# Altium PCB PCB_BoostingConverter.PcbDoc
Units mil, origin at the board's own origin, x right, y up, seen from the top; angles counter-clockwise.
Board outline 1889.76 x 944.88 mil, 2 copper layers (Top Layer, Bottom Layer); 13 components, 10 nets, 40 pads, 5 vias.
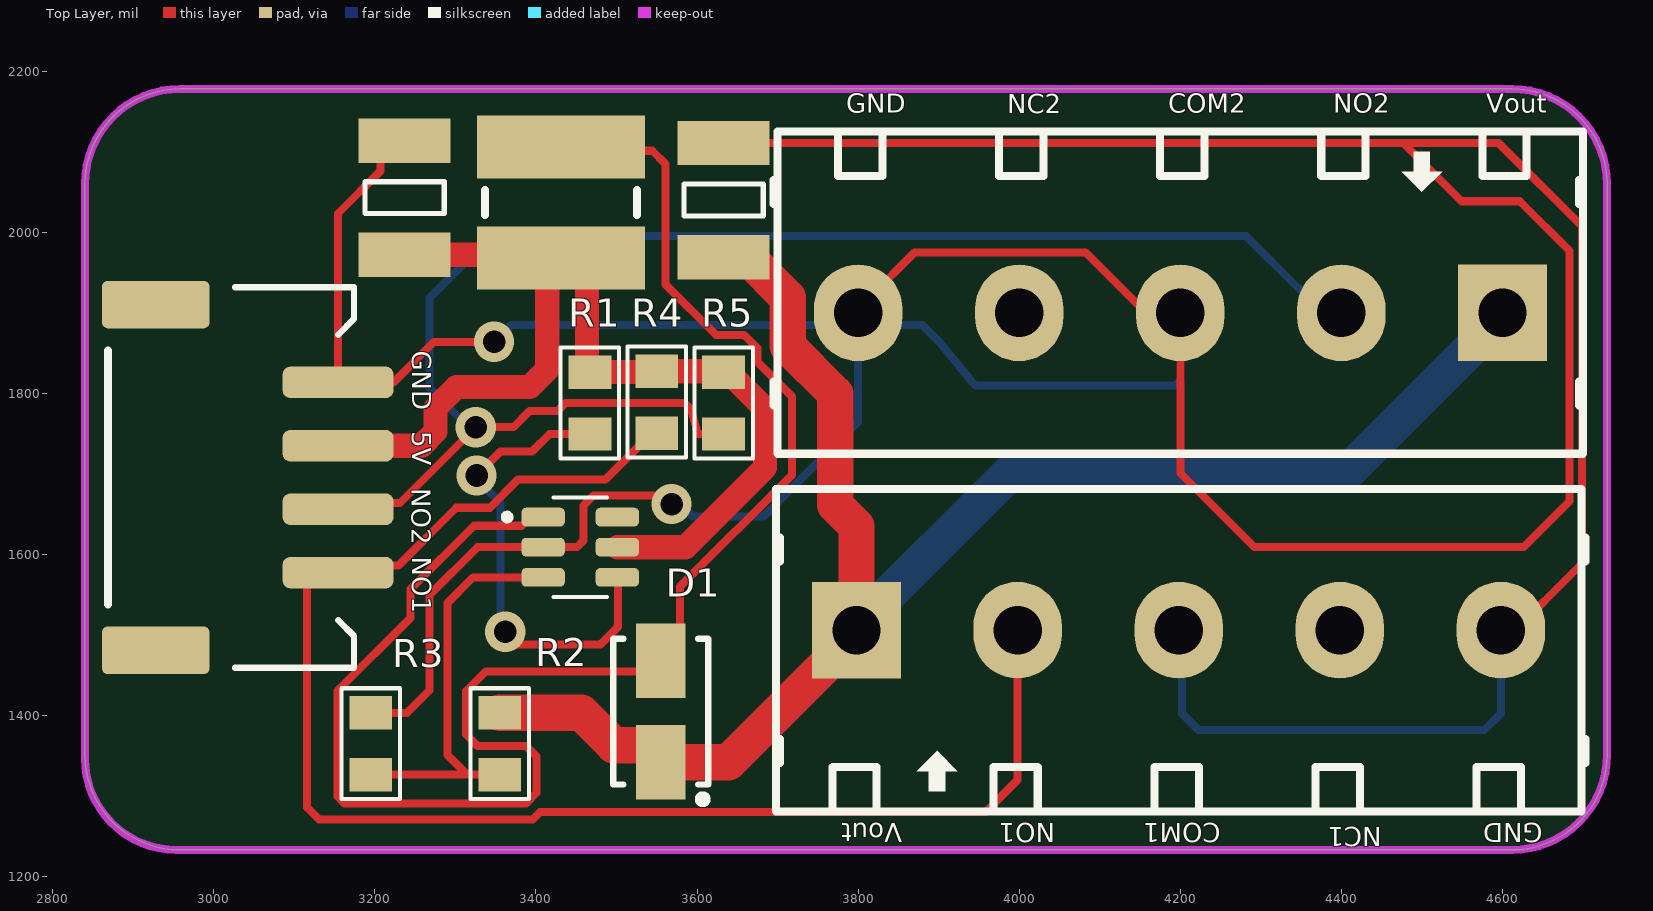
[diagram p0: Top Layer view]
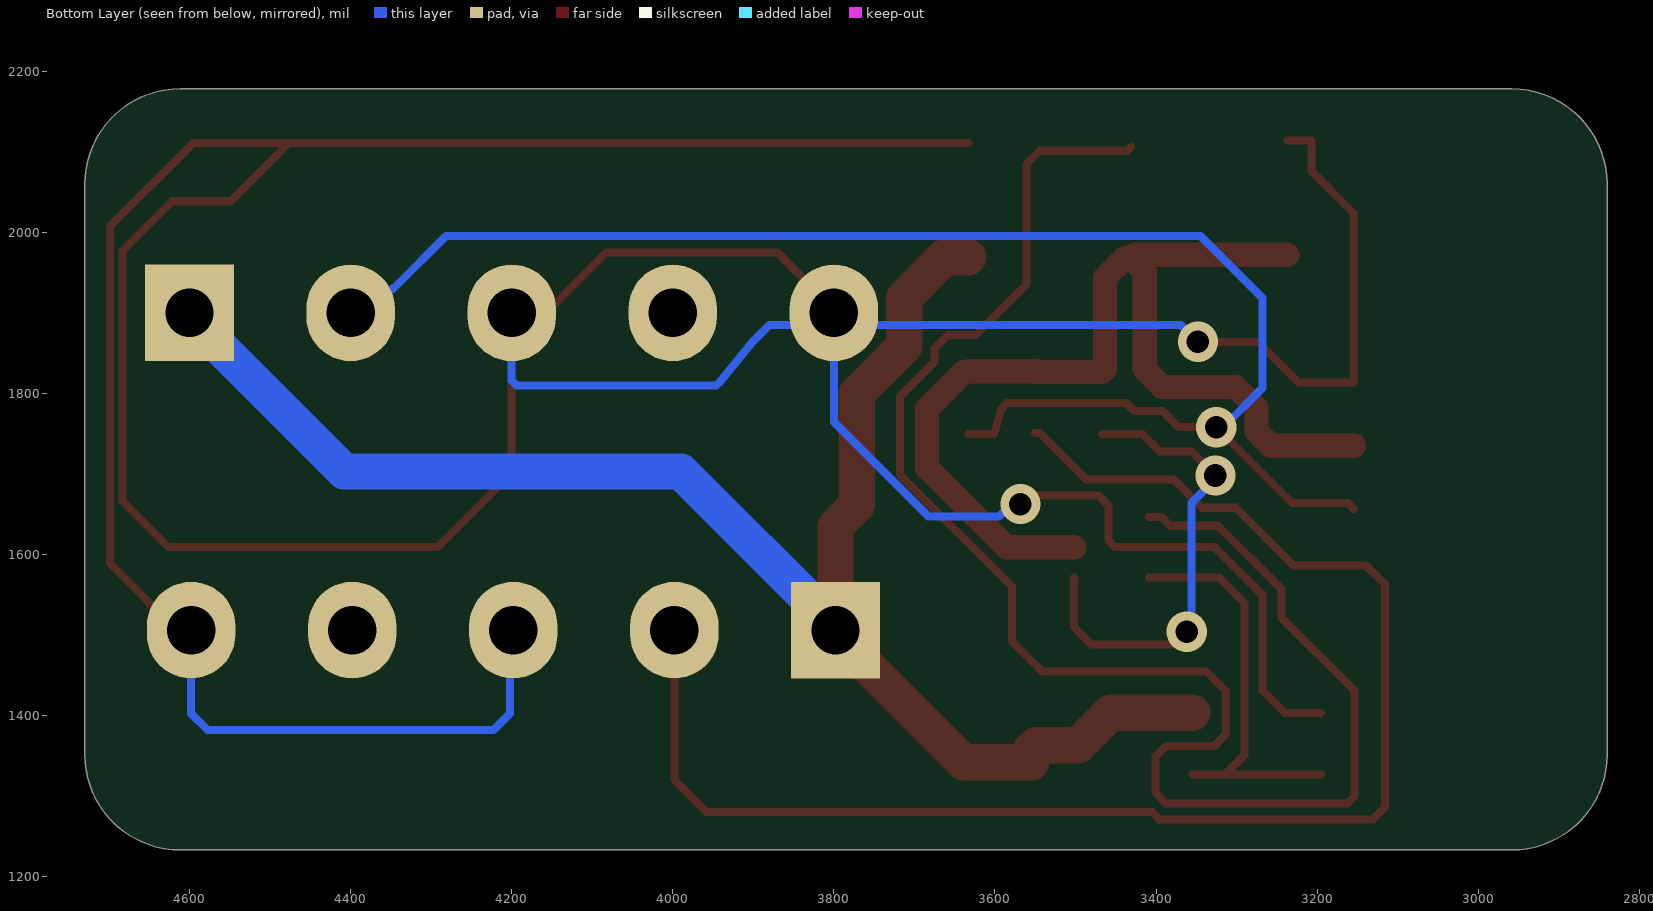
[diagram p1: Bottom Layer view, seen from below]

## Layer stack, top to bottom
Top Solder: solder mask 0.4, Solder Resist, Dk 3.5
Top Layer: signal copper 1.4
Dielectric 1: dielectric 12.6, FR-4, Dk 4.8
Bottom Layer: signal copper 1.4
Bottom Solder: solder mask 0.4, Solder Resist, Dk 3.5

## Board outline
2840.08,1351.26 2840.08,2059.92 cw(c2958.19,2059.92) 2958.19,2178.03 4611.73,2178.03 cw(c4611.73,2059.92) 4729.84,2059.92 4729.84,1351.26 cw(c4611.73,1351.26) 4611.73,1233.15 2958.19,1233.15 cw(c2958.19,1351.26)

## Design rules (kind name [scope] priority, off if disabled: settings)
Clearance [All] p1: gap=10 ignorepadtopadclearanceinfootprint=FALSE except(0: Arc-Hole Track-Hole SMDPad-Hole THPad-Hole Via-Hole Fill-Hole Poly-Hole Region-Hole Text-Hole)
PolygonConnect [All] p1: connectstyle=Relief reliefconductorwidth=10 reliefentries=4 polygonreliefangle="90 Angle" airgapwidth=10
RoutingVias [All] p1: holewidth=28 width=50 viastyle="Through Hole" minholewidth=28 minwidth=50 maxholewidth=28 maxwidth=50
SolderMaskExpansion [All] p1: expansion=4 istentingtop=FALSE
Width [All] p1: maxlimit=50 minlimit=10 preferedwidth=10 minimp=50.000000 maximp=50.000000 favimp=50.000000
30 further rules are at their usual default settings.

## Classes and differential pairs
component class boostConverter: D1 R1 R2 R4 R5

## Components (designator, comment, footprint, x,y, rotation, side; value= is the part's Value field where it differs from the comment)
C1 "22uF" "C 1210" 3237,2043 r90 top
C2 "22uF" "C 1210" 3633,2040 r90 top
D1 "SS24" "DO-214AC (SMA)" 3555,1405 r270 top
L? "22uH" "Inductor SMD CDRH3D48" 3431,2037 r90 top
P? "Header 4" HDR/Header/4/2mm/BOX/SMD 3154.38,1695.57 r90 top
P? "Header 5" HDR/Terminal/5/RA 4200,1900 r180 top
P? "Header 5" HDR/Terminal/5/RA 4198,1506 r0 top
R1 "10k" "R 0805" 3467,1788 r90 top
R2 "62k" "R 0805" 3355,1365 r90 top
R3 "3.3k" "R 0805" 3195,1365 r270 top
R4 "10k" "R 0805" 3550,1789 r270 top
R5 "10k" "R 0805" 3633,1788 r270 top
U? "MT3608" SOT95P280X145-6N 3455,1609 r0 top

## Footprints (in the part's own frame and the unit in brackets; to place one, negate y for a bottom-side part, rotate by r counter-clockwise, add the part's x,y. Pads: shape width x height; smd on the part's side, far side on the other; paste and mask are expansions set on the pad)
"C 1210" [mm]
  rect 1.4x2.9 smd: 1(-1.8,0) 2(1.8,0)
  silkscreen extent -0.5,-1.25 0.5,1.25, body extent -1.6,-1.25 1.6,1.25, height 0.79
"DO-214AC (SMA)" [mm] "Molded Diode, 2-Leads, Body 4.3x2.7mm, IPC Medium Density"
  rect 2.35x1.55 smd: 1(-1.6,0) 2(1.6,0)
  silkscreen extent -2.3,-1.5 2.89,1.5, body extent -2.6,-1.3 2.6,1.3, height 2.4
HDR/Header/4/2mm/BOX/SMD [mm]
  rrect50% 1x3.5 smd: 1(-3,0) 2(-1,0) 3(1,0) 4(3,0)
  rrect25% 1.5x3.4 smd: SHIELD(-5.45,5.75) SHIELD(5.45,5.75)
  silkscreen extent -6,-0.5 6,7.25, body extent -5.95,-1.35 5.95,7.25, height 4.8
HDR/Terminal/5/RA [mil]
  rect 110x120 hole 60: 1(-400,0)
  oval 110x120 hole 60: 2(-200,0) 3(0,0) 4(200,0) 5(400,0)
  silkscreen extent -500,-225 505,175, body extent -529,-218 500,168, height 559
"Inductor SMD CDRH3D48" [mm] "Precision Wire Wound Inductor, 2-Leads, Body 10.0x8.0mm, IPC Low Density"
  rect 2x5.3 smd: 1(-1.75,0) 2(1.75,0)
  silkscreen extent -0.4,-2.4 0.4,2.4, body extent -2.25,-2.24 2.25,2.25, height 3.5
"R 0805" [mm] "Chip Resistor, 2-Leads, Body 2.0x1.3mm, IPC Medium Density"
  rect 1.05x1.35 smd: 1(-0.975,0) 2(0.975,0)
  silkscreen extent -1.75,-0.93 1.75,0.93, body extent -1,-0.61 1,0.59, height 0.5
SOT95P280X145-6N [mm]
  rrect50% 1.37x0.59 smd: 1(-1.17,0.95) 3(-1.17,-0.95) 4(1.17,-0.95) 5(1.17,0) 6(1.17,0.95)
  rrect50% 1.37x0.59 smd paste+0: 2(-1.17,0)
  silkscreen extent -2.4,-1.56 0.85,1.56, body extent -1.4,-1.45 1.4,1.45, height 1.45

## Part data
C1 C2: library part "Capacitor NP", "Capacitor non-pol"
D1: library part "Diode Schottky", "Schottky Diode"
L?: library part Inductor, "Inductor"
P?: "Header, 4-Pin"
P? P?: "Header, 5-Pin"
R1 R2 R3 R4 R5: library part Resistor, "Resistor"
U?: "High Efficiency 1.2MHz2A Step Up Converter", PACKAGE=Package, Availability="Not in stock", Check_prices=https://www.snapeda.com/parts/MT3608/Aerosemi+Technology+Co.%252C+Ltd/view-part/?ref=eda, MF="Aerosemi Technology Co., Ltd", MP=MT3608, Price=None, SnapEDA_Link=https://www.snapeda.com/parts/MT3608/Aerosemi+Technology+Co.%252C+Ltd/view-part/?ref=snap

## Via types
v1: diameter 50, hole 28, Top Layer to Bottom Layer, 5 vias

## Nets (pads, with @x,y where several pads share a name; then routed paths per layer and width w, separated by ;. In a path a pad name is that pad's centre, name@x,y a point inside that pad or via, vN(x,y) a via of type N, cw(c..) or ccw(c..) an arc to the next point about the centre after c; other vN are vias at no path point)
5V: C1.1 L?.1 P?.3@3154.38,1734.94 R1.2 R4.1 R5.1 U?.5 | length 1353.1
  Top Layer w30: P?.3@3154.38,1734.94 3257.74,1734.94 3275.31,1752.51 3275.31,1782 3301.31,1808 3392.31,1808 3414,1829.69 3414,1951.1 L?.1 ; C1.1 3426.97,1972.13 L?.1 ; U?.5 3585.57,1609 3684.57,1708 3684.57,1780.72 3638.91,1826.39 R5.1 3632,1827.39 R4.1 3549,1826.39 R1.2 3463.31,1830.08 3463.31,1943.73 3438.94,1968.1 L?.1
COM1: C1.2 C2.2 P?.3@4198,1506 P?.3@4200,1900 P?.4@3154.38,1813.68 P?.5 R3.1 U?.2 | length 6612.1
  Top Layer w10: R3.1 3240,1403.39 3268,1431.39 3268,1549.72 3327.28,1609 3450.91,1609 3459.1,1617.19 3459.1,1660.83 3471.28,1673.02 3547.17,1673.02 3557.61,1662.57 v1(3568.44,1662.57) ; C1.2 3207,2113.87 3207,2076 3154,2023 3154,1813.68 3154.38,1813.68 3223,1813.68 3273.32,1864 v1(3348,1864) ; C2.2 4476.84,2110.87 ; P?.5@3815,1900 3815,1920 3870,1975 4082.61,1975 P?.3@4181.3,1876.3 ; P?.3@4200,1900 4200,1701.13 4292.13,1609 4626,1609 4683,1666 4683,1977 4621.46,2038.54 4549.17,2038.54 4476.84,2110.87 ; P?.5@4607,1497 4699,1589 4699,2007 4595.13,2110.87 4476.84,2110.87
  Bottom Layer w10: v1(3348,1864) 3369,1885 3785,1885 P?.5@3800,1900 ; v1(3568.44,1662.57) 3579.26,1662.57 3594.83,1647 3682.43,1647 3800,1764.57 P?.5@3800,1900 ; P?.3@4198,1506 4202,1502 4202,1402.72 4222.72,1382 4577.4,1382 4598,1402.6 P?.5@4598,1506 ; P?.3@4200,1900 4200,1815.86 4194.14,1810 3945.6,1810 3942.31,1813.28 3900,1865 3880,1885 3815,1885 3812.07,1887.93 P?.5@3800,1900
NC1: P?.4@4398,1506
NC2: P?.4@4000,1900
NetD1_1: D1.1 L?.2 U?.1 | length 2116.2
  Top Layer w10: U?.1 3393.15,1646.4 3382.36,1635.61 3322.9,1635.61 3244.22,1556.94 3244.22,1521.06 3153.43,1430.27 3153.43,1299.73 3162.21,1290.94 3387.79,1290.94 3400.9,1304.05 3400.9,1349.18 3387.79,1362.28 3327.65,1362.28 3313.43,1376.5 3313.43,1430.27 3337.75,1454.6 3541.6,1454.6 D1.1 3579,1491.99 3579,1560 3717.79,1698.79 3717.79,1796.11 3685.7,1828.21 3675,1838.91 3675,1856 3658.3,1872.71 3623.57,1872.71 3560.91,1935.36 3560.91,2084.8 3544.47,2101.24 3435.66,2101.24 L?.2
NetR1_1: R1.1 U?.4 | length 589.2
  Top Layer w10: v1(3326.3,1698.01) 3355.93,1727.64 3395.1,1727.64 3417.08,1749.61 R1.1 ; v1(3362,1504) 3378,1488 3480,1488 3502,1510 3502,1571.6 U?.4
  Bottom Layer w10: v1(3326.3,1698.01) 3326.3,1693.48 3355.85,1663.92 3355.85,1510.15 v1(3362,1504)
NetR2_1: R2.1 R3.2 U?.3 | length 515.5
  Top Layer w10: R3.2 3314.53,1326.61 ; R2.1 3314.53,1326.61 ; U?.3 3321.74,1571.6 3290,1539.86 3290,1351.14 3314.53,1326.61
NO1: P?.1@3154.38,1577.46 P?.2@3998,1506 R4.2 | length 1883.4
  Top Layer w10: R4.2 3544.09,1750.61 3486.5,1693.02 3377.87,1693.02 3342.86,1658.01 3301.01,1658.01 3229.43,1586.43 3139.29,1586.43 3116,1563.14 3116,1285.86 3130.91,1270.94 3396.07,1270.94 3405.13,1280 3958,1280 3998,1320 P?.2@3998,1506
NO2: P?.2@3154.38,1656.2 P?.2@4400,1900 R5.2 | length 1951.2
  Top Layer w10: P?.2@3154.38,1656.2 3161.83,1663.65 3230.96,1663.65 v1(3325.31,1758) ; v1@3326.95,1756.36 3328.59,1758 3372.1,1758 3392.1,1778 3426.93,1778 3436.93,1788 3584.83,1788 3592.08,1780.75 3601,1749.61 R5.2
  Bottom Layer w10: v1(3325.31,1758) 3316.54,1758 3268,1806.54 3268,1918.23 3345,1995.23 4281.77,1995.23 4346.5,1930.5 4347.44,1930.5 4377.94,1900 P?.2@4400,1900
Vout: C2.1 D1.2 P?.1@3798,1506 P?.1@4600,1900 R2.2 | length 2068.3
  Top Layer w45: R2.2 3456.57,1403.39 3496.69,1363.27 3549.49,1363.27 3555,1357.76 D1.2 3639.01,1342.01 3798,1501 3798,1506 3798,1635 3771.64,1661.36 3771.64,1799.62 3712.5,1858.76 3712.5,1919.16 3662.53,1969.13 C2.1
  Bottom Layer w45: P?.1@3798,1506 3798,1511 3990,1703 4408,1703 4600,1895 P?.1@4600,1900
pads on no net: P?.SHIELD U?.6

## Keep-outs
Top Layer:
  lines w10: 2840.08,1346.88 ccw(c2953.81,1346.88) 2953.81,1233.15 4611.73,1233.15 ccw(c4611.73,1351.26) 4729.84,1351.26 4729.84,2059.92 ccw(c4611.73,2059.92) 4611.73,2178.03 2958.19,2178.03 ccw(c2958.19,2059.92) 2840.08,2059.92 2840.08,1346.88

## Silkscreen, mask and mechanical layers (free items; w line width, h text height)
Top Overlay:
  text "GND" at 3785,2140.44 h40
  text "COM2" at 4185,2140.44 h40
  text "NO2" at 4390,2140.44 h40
  text "Vout" at 4580.04,2140.41 h40
  text "NC2" at 3985,2139.44 h40
  text "GND" at 3238.44,1853 h40 r270
  text "5V" at 3238.44,1753 h40 r270
  text "NO2" at 3237.44,1682 h40 r270
  text "NO1" at 3238.44,1597 h40 r270
  text "Vout" at 3854.96,1274.59 h40 r180
  text "NO1" at 4045,1274.56 h40 r180
  text "COM1" at 4250,1274.56 h40 r180
  text "GND" at 4650,1274.56 h40 r180
  text "NC1" at 4450,1269.56 h40 r180